# Altium PCB PCB.PcbDoc
Units mil, origin at the board's own origin, x right, y up, seen from the top; angles counter-clockwise.
Board outline 3930 x 2520 mil, 2 copper layers (Top Layer, Bottom Layer); 15 components, 44 nets, 149 pads, 25 vias.
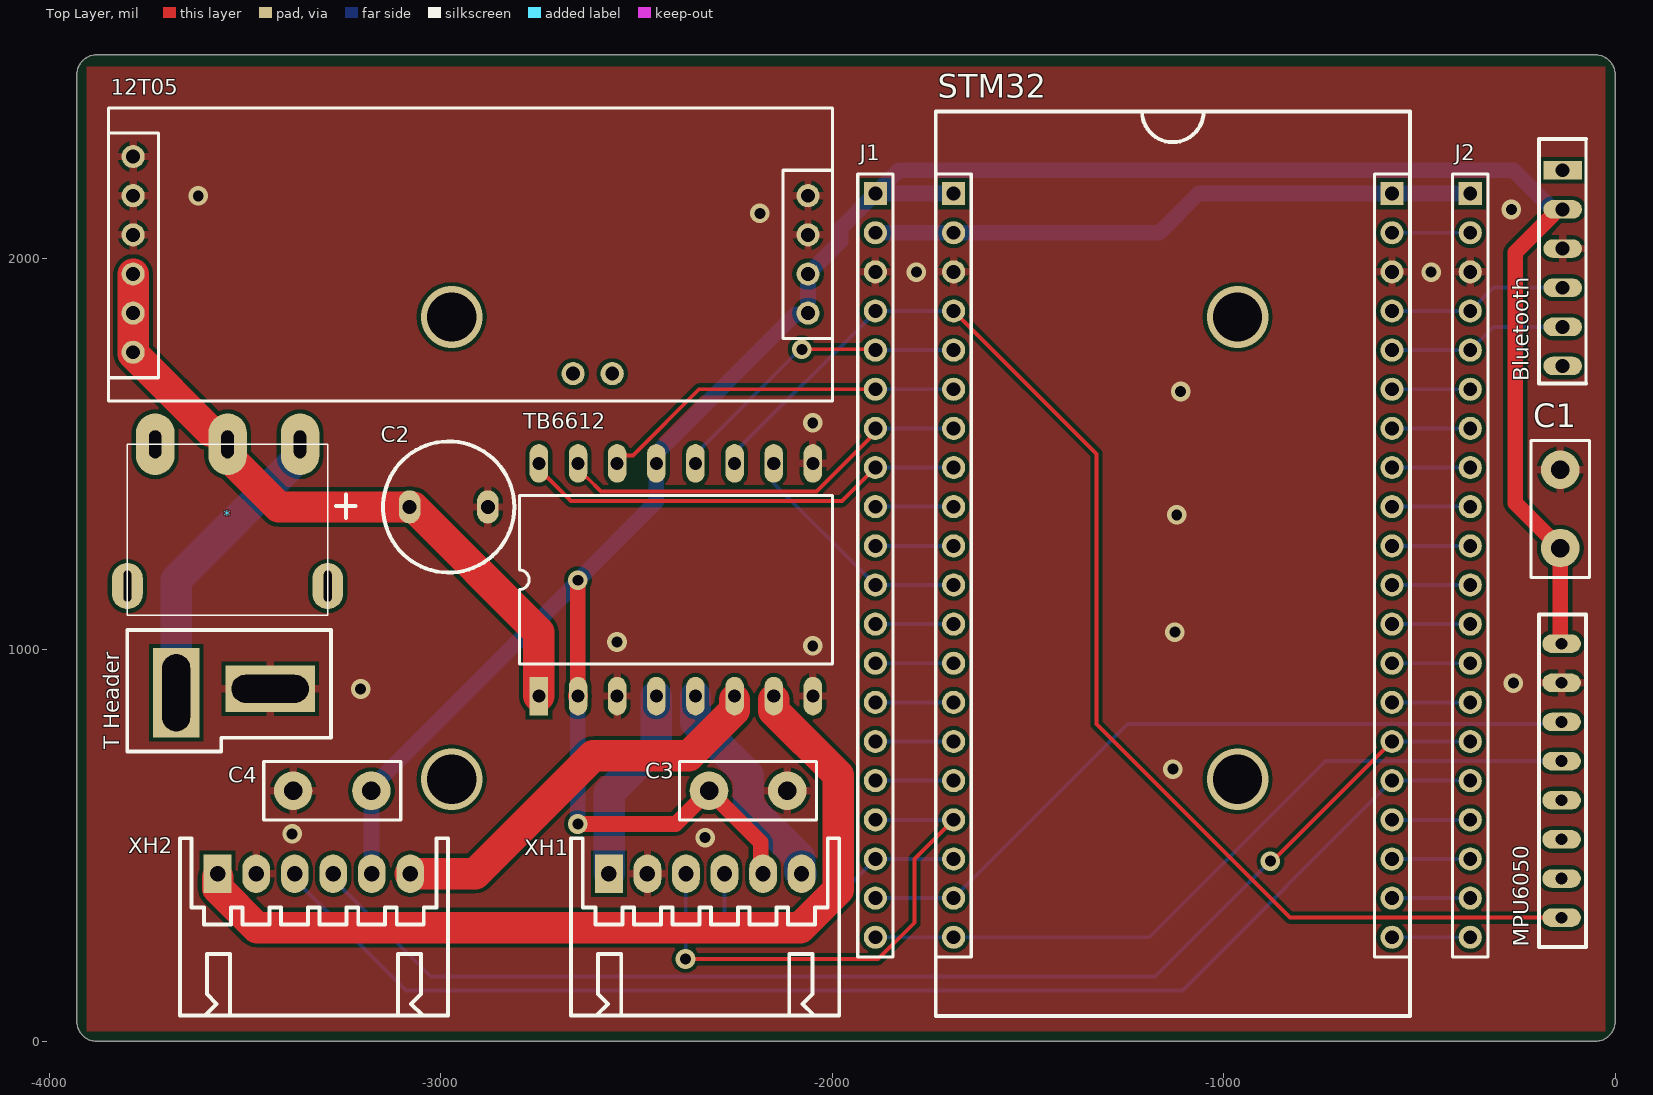
[diagram p0: Top Layer view]
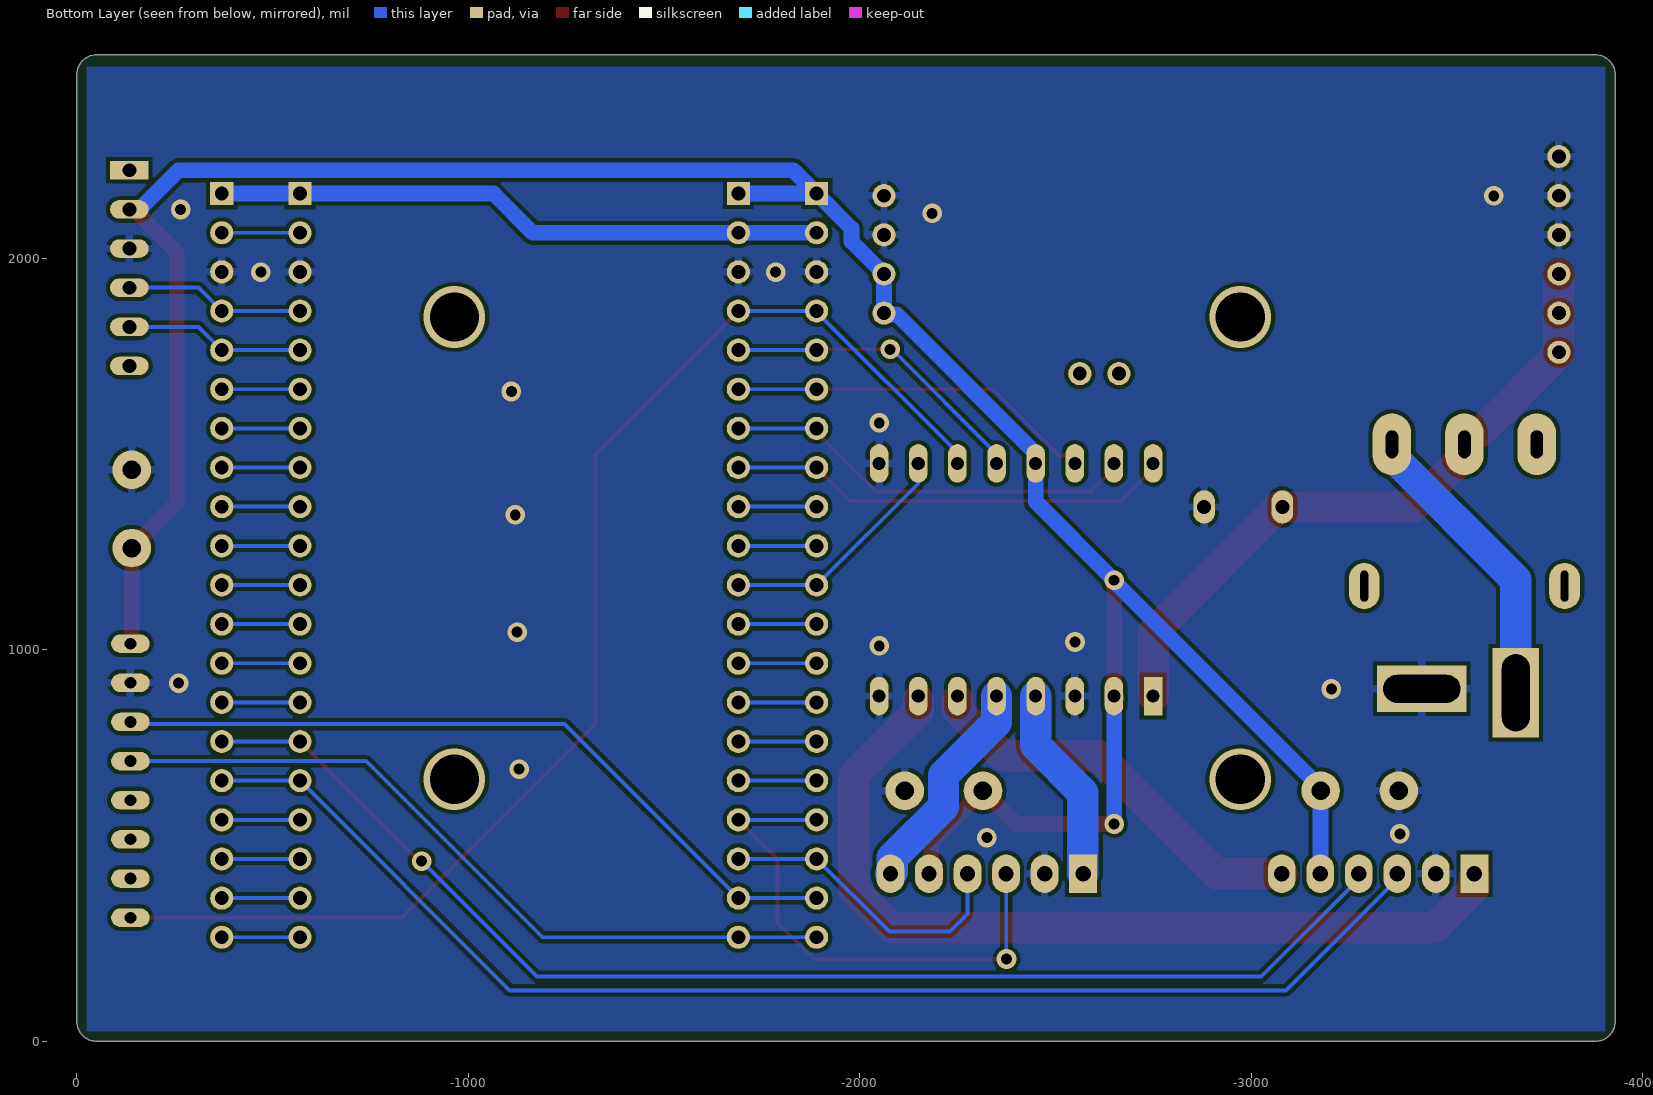
[diagram p1: Bottom Layer view, seen from below]

## Layer stack, top to bottom
Top Solder: solder mask 0.4, Solder Resist, Dk 3.5
Top Layer: signal copper 1.4
Dielectric 1: dielectric 12.6, FR-4, Dk 4.8
Bottom Layer: signal copper 1.4
Bottom Solder: solder mask 0.4, Solder Resist, Dk 3.5

## Board outline
-3930,50 ccw(c-3880,50) -3880,0 -50,0 ccw(c-50,50) 0,50 0,2470 ccw(c-50,2470) -50,2520 -3880,2520 ccw(c-3880,2470) -3930,2470

## Design rules (kind name [scope] priority, off if disabled: settings)
Clearance [All] p1: gap=10 ignorepadtopadclearanceinfootprint=FALSE except(0: Arc-Hole Track-Hole SMDPad-Hole THPad-Hole Via-Hole Fill-Hole Poly-Hole Region-Hole Text-Hole)
HoleSize [All] p1: absolutevalues=TRUE maxlimit=196.85 minlimit=1 maxpercent=80.000 minpercent=20.000
PlaneClearance [All] p1: clearance=8
PlaneConnect [All] p1: planeconnectstyle=Relief reliefexpansion=20 reliefentries=4 reliefconductorwidth=20 reliefairgap=10
PolygonConnect PolygonConnect_2 [All vs IsNamedPolygon('GND_L01_P001')] p1: thpad.connectstyle=Relief thpad.reliefconductorwidth=20 thpad.reliefentries=4 thpad.polygonreliefangle="90 Angle" thpad.airgapwidth=10 smdpad.connectstyle=Relief smdpad.reliefconductorwidth=10 smdpad.reliefentries=4 smdpad.polygonreliefangle="90 Angle" smdpad.airgapwidth=10 via.connectstyle=Direct via.reliefconductorwidth=10 via.reliefentries=4 via.polygonreliefangle="90 Angle" via.airgapwidth=10
PolygonConnect PolygonConnect_1 [All vs IsNamedPolygon('GND_L02_P000')] p2: thpad.connectstyle=Relief thpad.reliefconductorwidth=20 thpad.reliefentries=4 thpad.polygonreliefangle="90 Angle" thpad.airgapwidth=10 smdpad.connectstyle=Relief smdpad.reliefconductorwidth=10 smdpad.reliefentries=4 smdpad.polygonreliefangle="90 Angle" smdpad.airgapwidth=10 via.connectstyle=Direct via.reliefconductorwidth=10 via.reliefentries=4 via.polygonreliefangle="90 Angle" via.airgapwidth=10
PolygonConnect [All] p3: thpad.connectstyle=Relief thpad.reliefconductorwidth=10 thpad.reliefentries=4 thpad.polygonreliefangle="90 Angle" thpad.airgapwidth=10 smdpad.connectstyle=Relief smdpad.reliefconductorwidth=10 smdpad.reliefentries=4 smdpad.polygonreliefangle="90 Angle" smdpad.airgapwidth=10 via.connectstyle=Direct via.reliefconductorwidth=10 via.reliefentries=4 via.polygonreliefangle="90 Angle" via.airgapwidth=10
RoomDefinition 原理图 [InComponentClass('原理图')] p1: confinementstyle=ConfineIn formatcopy=TRUE lockcomponents=FALSE outline -3930,0 0,0 0,2519.68 -3930,2519.68
RoutingVias [All] p1: holewidth=28 width=50 viastyle="Through Hole" minholewidth=12 minwidth=22 maxholewidth=196.85 maxwidth=196.85
SilkToSolderMaskClearance [IsPad] p1: minsilkscreentomaskgap=0 clearancetoexposedcopper=TRUE
SolderMaskExpansion [All] p1: expansion=4 istentingtop=FALSE
Width 电源 [InNetClass('pwr')] p1: maxlimit=100 minlimit=40 preferedwidth=80
Width [All] p2: maxlimit=10 minlimit=10 preferedwidth=10
26 further rules are at their usual default settings.

## Classes and differential pairs
net class pwr: 3V3 5V +12 AO1 AO2 BO1 BO2 GND Net*_1

## Components (designator, comment, footprint, x,y, rotation, side; value= is the part's Value field where it differs from the comment)
12T05 "稳压12T05 T03.3" "稳压12T05 T03.3" -3786.39,2260.24 r0 top
* "KEY" SS12d11拨动电源开关 -3359.96,1525 r180 top
Bluetooth "蓝牙" 1*6弯排母 -133.94,2225.23 r270 top
C1 "0.1uF" RAD-0.2 -140,1260 r90 top
C2 "220uF" DIP-EC8X12 -3080,1365 r0 top
C3 "0.1uF" RAD-0.2 -2315,640 r0 top
C4 "0.1uF" RAD-0.2 -3177.59,640 r180 top
J1 "Female HDR1X20" Fe-HDR1X20/2.54-S -1890,2165.71 r270 top
J2 "Female HDR1X20" Fe-HDR1X20/2.54-S -370,2165.71 r270 top
MPU6050 "MPU6050" MPU6050 306.06,675.7 r270 top
STM32 "STM32" stm32 -1130,1220 r0 top
"T Header" "T型接头" "T HEAD" -3436.29,900.47 r180 top
TB6612 "TB6612" TB6612 -2749.66,881.82 r90 top
XH1 "" XH6/2.54mm/90 -2570.73,427.97 r0 top
XH2 "" XH6/2.54mm/90 -3570.5,427.97 r0 top

## Footprints (in the part's own frame and the unit in brackets; to place one, negate y for a bottom-side part, rotate by r counter-clockwise, add the part's x,y. Pads: shape width x height; smd on the part's side, far side on the other; paste and mask are expansions set on the pad)
1*6弯排母 [mm] "Connector; Header; 4 Position"
  rect 1.2x2.5 hole 0.9: 1(0,0)
  oval 1.2x2.5 hole 0.9: 2(2.54,0) 3(5.08,0) 4(7.62,0) 5(10.16,0) 6(12.7,0)
  silkscreen extent -2.03,-1.52 13.84,1.52
DIP-EC8X12 [mil]
  oval 55x85 hole 35.43: 1(0,0) 2(200,0)
  silkscreen extent -188,-168 268,168, body extent -61,-161 261,161, height 567
Fe-HDR1X20/2.54-S [mm]
  rect 1.5x1.5 hole 0.9: 1(0,0)
  round 1.5 hole 0.9: 2(2.54,0) 3(5.08,0) 4(7.62,0) 5(10.16,0) 6(12.7,0) 7(15.24,0) 8(17.78,0) 9(20.32,0) 10(22.86,0) 11(25.4,0) 12(27.94,0) 13(30.48,0) 14(33.02,0) 15(35.56,0) 16(38.1,0) 17(40.64,0) 18(43.18,0) 19(45.72,0) 20(48.26,0)
  silkscreen extent -1.27,-1.14 49.53,1.14, body extent -1.4,-1.27 49.65,1.23, height 2.74
MPU6050 [mm]
  oval 1.2x2.5 hole 0.762: 1(-8.636,-11.246) 2(-6.096,-11.246) 3(-3.556,-11.246) 4(-1.016,-11.246)
  oval 1.2x2.5 hole 0.76: 5(1.524,-11.246) 6(4.064,-11.246) 7(6.604,-11.246) 8(9.144,-11.246)
  silkscreen extent -10.54,-12.7 11.05,-9.65
RAD-0.2 [mm]
  round 2.5 hole 1.2: 1(0,0) 2(5.08,0)
  silkscreen extent -1.91,-1.91 6.98,1.91, body extent -0.96,-0.85 6.04,0.85, height 7.06
SS12d11拨动电源开关 [mm]
  oval 2x3 hole 0.5 slot 2 at 90 deg: 0(-1.8,9.2) 0(11.2,9.2)
  oval 2.5x4 hole 0.8 slot 1.8 at 90 deg: 1(0,0) 2(4.7,0) 3(9.4,0)
  silkscreen extent -1.8,0 11.2,11.1
stm32 [mm]
  rect 1.5x1.5 hole 0.9: 1(-14.224,24.021) 40(14.224,24.021)
  round 1.5 hole 0.9: 2(-14.224,21.481) 3(-14.224,18.941) 4(-14.224,16.401) 5(-14.224,13.861) 6(-14.224,11.321) 7(-14.224,8.781) 8(-14.224,6.241) 9(-14.224,3.701) 10(-14.224,1.161) 11(-14.224,-1.379) 12(-14.224,-3.919) 13(-14.224,-6.459) 14(-14.224,-8.999) 15(-14.224,-11.539) 16(-14.224,-14.079) 17(-14.224,-16.619) 18(-14.224,-19.159) 19(-14.224,-21.699) 20(-14.224,-24.239) 21(14.224,-24.239) 22(14.224,-21.699) 23(14.224,-19.159) 24(14.224,-16.619) 25(14.224,-14.079) 26(14.224,-11.539) 27(14.224,-8.999) 28(14.224,-6.459) 29(14.224,-3.919) 30(14.224,-1.379) 31(14.224,1.161) 32(14.224,3.701) 33(14.224,6.241) 34(14.224,8.781) 35(14.224,11.321) 36(14.224,13.861) 37(14.224,16.401) 38(14.224,18.941) 39(14.224,21.481)
  silkscreen extent -15.38,-29.35 15.38,29.35, body extent -15.49,-25.63 15.45,25.42, height 2.74
"T HEAD" [mm]
  rect 5.8x3 hole 1.8 slot 5 at 0 deg: 1(0,0)
  rect 3x5.8 hole 1.8 slot 5 at 90 deg: 2(6.096,0.254)
  silkscreen extent -3.94,-3.81 9.27,4.06
TB6612 [mm]
  rect 2.5x1.2 hole 0.85: 1(0,0)
  oval 2.5x1.2 hole 0.85: 2(0,-2.54) 3(0,-5.08) 4(0,-7.62) 5(0,-10.16) 6(0,-12.7) 7(0,-15.24) 8(0,-17.78) 9(15.1,-17.78) 10(15.1,-15.24) 11(15.1,-12.7) 12(15.1,-10.16) 13(15.1,-7.62) 14(15.1,-5.08) 15(15.1,-2.54) 16(15.1,0)
  silkscreen extent 2.08,-19.05 13.02,1.27
XH6/2.54mm/90 [mm]
  rect 1.8x2.5 hole 1: 1(0,0)
  oval 1.8x2.5 hole 1: 2(2.5,0) 3(5,0) 4(7.5,0) 5(10,0) 6(12.5,0)
  silkscreen extent -2.45,-9.2 14.95,2.3, body extent -2.45,-9.2 14.95,2.3, height 6.1
"稳压12T05 T03.3" [mm]
  round 1.5 hole 0.9: 1(0,0) 2(0,-2.54) 3(0,-5.08) 4(0,-7.62) 5(0,-10.16) 6(0,-12.7) 7(43.8,-10.16) 8(43.8,-7.62) 9(43.8,-5.08) 10(43.8,-2.54) 11(31.091,-14.089) 12(28.551,-14.089)
  silkscreen extent -1.6,-15.85 45.4,3.15

## Part data
C1 C3 C4: library part CAP, "无极性电容"
C2: library part DIP_ECAP, "直插电解电容"
XH1 XH2: library part XH6

## Via types
v1: diameter 50, hole 28, Top Layer to Bottom Layer, tented both sides, 17 vias
v2: diameter 50, hole 28, Top Layer to Bottom Layer, 4 vias
v3: diameter 157.48, hole 125.98, Top Layer to Bottom Layer, 4 vias

## Nets (pads, with @x,y where several pads share a name; then routed paths per layer and width w, separated by ;. In a path a pad name is that pad's centre, name@x,y a point inside that pad or via, vN(x,y) a via of type N, cw(c..) or ccw(c..) an arc to the next point about the centre after c; other vN are vias at no path point)
3V3: J1.2 J2.1 STM32.2 STM32.40 | length 1561.4
  Bottom Layer w40: J1.2 STM32.2 -1164.29,2065.71 -1064.29,2165.71 STM32.40 J2.1
5V: 12T05.7 12T05.8 Bluetooth.2 C1.1 C3.1 C4.1 J1.1 MPU6050.1 STM32.1 TB6612.2 TB6612.13 XH1.5 XH2.5 | length 6815.6
  Top Layer w40: v1(-2650,555) -2400,555 C3.1 -2182.93,507.93 -2182.93,433.87 XH1.5 ; TB6612.2@-2650,882.16 v1(-2650,1177.77) ; MPU6050.1 -140,1019.01 C1.1 -255,1375 -255,2015 -160.91,2109.09 -160.91,2121.88 -157.57,2125.23 Bluetooth.2
  Top Layer w50: TB6612.2@-2650,882.16 TB6612.2
  Bottom Layer w40: XH2.5 -3177.2,428.36 -3177.2,639.6 C4.1 -3177.59,647.47 -2650,1175.06 v1(-2650,1177.77) -2449.66,1378.11 TB6612.13 -2449.66,1501.89 -2094.95,1856.6 -2065.63,1856.6 12T05.7 12T05.8 -1978.93,2043.29 -1978.93,2076.77 J1.1 ; v1(-2650,555) -2650,871.47 -2655,876.47 TB6612.2 ; C3.1@-2326.18,628.82 C3.1 ; STM32.1 J1.1 ; Bluetooth.2 -159.53,2125.23 -259.53,2225.24 -1830.47,2225.24 J1.1
+12: 12T05.4 12T05.5 12T05.6 *.2 C2.1 TB6612.1 | length 1733.8
  Top Layer w80: 12T05.6 12T05.6@-3786.4,1756.4 ; 12T05.4 12T05.5 12T05.6@-3786.4,1756.4 ; TB6612.1 -2749.66,1044.66 -3070,1365 C2.1 -3414.53,1365 -3538.98,1489.45 -3538.98,1543.52 -3553.51,1558.05 -3588.05,1558.05 12T05.6@-3786.4,1756.4
AO1: TB6612.4 XH1.1 | length 504
  Bottom Layer w80: XH1.1 -2570,428.7 -2570,635 -2449.66,755.34 TB6612.4
AO2: TB6612.5 XH1.6 | length 566.6
  Bottom Layer w80: TB6612.5 -2349.66,814.96 -2214.21,679.52 -2214.21,598.9 -2149.12,533.81 -2148.27,533.81 -2083.17,468.71 -2083.17,432.54 XH1.6
BO1: TB6612.7 XH2.1 | length 2249.4
  Top Layer w80: XH2.1@-3570.5,418.75 -3570.5,390.5 -3470,290 -2081.97,290 -1985,386.97 -1985,680 -2149.66,844.66 TB6612.7@-2149.66,872.6
BO2: TB6612.6 XH2.6 | length 1028.7
  Top Layer w80: XH2.6 -2912.03,427.97 -2610.79,729.21 -2366.1,729.21 -2249.66,845.65 TB6612.6@-2249.66,872.6
GND: 12T05.1 12T05.2 12T05.3 12T05.9 12T05.10 "T Header.1" Bluetooth.3 C1.2 C2.2 C3.2 C4.2 J1.3 J2.3 MPU6050.2 STM32.3 STM32.38 TB6612.3 TB6612.8 TB6612.9 XH1.2 XH2.2
  other v1: -2325,520 -3380,530 -3205,900 -260,915 -2050,1010 -2550,1020 -2050,1580 -1785,1965 -470,1965 -2185,2115 -265,2125 -3620,2160
  other v2: -1130,695 -1125,1045 -1120,1345 -1110,1660
Net*_1: "T Header.2" *.1 | length 795.1
  Top Layer w80: *.1@-3359.96,1495.47 *.1
  Bottom Layer w80: -3676.29,890.47 -3676.29,1179.14 -3359.96,1495.47 *.1
PA0: J2.16 STM32.25 XH2.3 | length 3357
  Bottom Layer w10: XH2.3 -3373.65,414.19 -3089.46,130 -1105.71,130 STM32.25 J2.16
PA1: J2.15 STM32.26 XH2.4 | length 3271
  Top Layer w10: v1(-880.53,460) -875.71,460 STM32.26
  Bottom Layer w10: XH2.4 -3275.22,414.19 -3026.04,165 -1175.53,165 v1(-880.53,460) ; STM32.26 J2.15
PA2: J2.14 STM32.27 | length 200
  Bottom Layer w10: STM32.27 J2.14
PA3: J2.13 STM32.28 | length 200
  Bottom Layer w10: STM32.28 J2.13
PA4: J2.12 STM32.29 | length 200
  Bottom Layer w10: STM32.29 J2.12
PA5: J2.11 STM32.30 | length 200
  Bottom Layer w10: STM32.30 J2.11
PA6: J2.10 STM32.31 | length 200
  Bottom Layer w10: STM32.31 J2.10
PA7: J2.9 STM32.32 | length 200
  Bottom Layer w10: STM32.32 J2.9
PA8: J1.8 STM32.8 TB6612.16 | length 1144.1
  Top Layer w10: TB6612.16 -2749.66,1460.79 -2727.77,1438.9 -2726.85,1438.9 -2667.95,1380 -1975.71,1380 J1.8
  Bottom Layer w10: J1.8 STM32.8
PA9: J1.9 STM32.9 | length 200
  Bottom Layer w10: J1.9 STM32.9
PA10: J1.10 STM32.10 | length 200
  Bottom Layer w10: J1.10 STM32.10
PA11: J1.11 STM32.11 TB6612.10 | length 618.1
  Bottom Layer w10: TB6612.10 -2149.66,1425.36 J1.11 STM32.11
PA12: J1.12 STM32.12 | length 200
  Bottom Layer w10: J1.12 STM32.12
PA15: J1.13 STM32.13 | length 200
  Bottom Layer w10: J1.13 STM32.13
PB0: J2.8 STM32.33 | length 200
  Bottom Layer w10: STM32.33 J2.8
PB1: J2.7 STM32.34 | length 200
  Bottom Layer w10: STM32.34 J2.7
PB2: J2.6 STM32.35 | length 200
  Bottom Layer w10: STM32.35 J2.6
PB3: J1.14 STM32.14 | length 200
  Bottom Layer w10: J1.14 STM32.14
PB4: J1.15 STM32.15 | length 200
  Bottom Layer w10: J1.15 STM32.15
PB5: J1.16 STM32.16 | length 200
  Bottom Layer w10: J1.16 STM32.16
PB6: J1.17 STM32.17 XH1.3 | length 1346.2
  Top Layer w10: v1(-2375,210) -1882.74,210 -1790,302.74 -1790,465.71 STM32.17
  Bottom Layer w10: v1(-2375,210) -2374.44,210.56 -2374.44,427.41 XH1.3 ; J1.17 STM32.17
PB7: J1.18 STM32.18 XH1.4 | length 783.7
  Bottom Layer w10: XH1.4 -2275,427.52 -2275,325 -2230,280 -2075.71,280 J1.18 STM32.18
PB8: J1.19 MPU6050.3 STM32.19 | length 1934.1
  Bottom Layer w10: J1.19 STM32.19 -1245.47,810.24 MPU6050.3@-140,810.24
PB9: J1.20 MPU6050.4 STM32.20 | length 1939.7
  Bottom Layer w10: J1.20 STM32.20 -1189.29,265.71 -739.29,715.71 MPU6050.4
PB10: Bluetooth.5 J2.5 STM32.36 | length 460.7
  Bottom Layer w10: STM32.36 J2.5 -310.48,1825.23 Bluetooth.5
PB11: Bluetooth.4 J2.4 STM32.37 | length 460.7
  Bottom Layer w10: STM32.37 J2.4 -310.48,1925.23 Bluetooth.4
PB12: J1.4 MPU6050.8 STM32.4 TB6612.11 | length 3338.3
  Top Layer w10: STM32.4 -1325,1500.71 -1325,810 -830.71,315.71 MPU6050.8
  Bottom Layer w10: TB6612.11 -2249.66,1503.97 -1890,1863.63 J1.4 STM32.4
PB13: J1.5 STM32.5 TB6612.12 | length 795.4
  Top Layer w10: v1(-2077.85,1767.85) -1892.15,1767.85 J1.5
  Bottom Layer w10: TB6612.12 -2349.66,1500.34 -2082.15,1767.85 v1(-2077.85,1767.85) ; J1.5 STM32.5
PB14: J1.6 STM32.6 TB6612.14 | length 940.1
  Top Layer w10: TB6612.14 -2549.66,1479.69 -2532.45,1496.89 -2509.28,1496.89 -2340.46,1665.71 J1.6
  Bottom Layer w10: J1.6 STM32.6
PB15: J1.7 STM32.7 TB6612.15 | length 1070.7
  Top Layer w10: TB6612.15 -2649.66,1460.79 -2628.61,1439.75 -2626,1439.75 -2591.25,1405 -2040.75,1405 -1890,1555.75 J1.7
  Bottom Layer w10: J1.7 STM32.7
PC13: J2.19 STM32.22 | length 200
  Bottom Layer w10: STM32.22 J2.19
PC14: J2.18 STM32.23 | length 200
  Bottom Layer w10: STM32.23 J2.18
PC15: J2.17 STM32.24 | length 200
  Bottom Layer w10: STM32.24 J2.17
VBAT: J2.20 STM32.21 | length 200
  Bottom Layer w10: STM32.21 J2.20
VDDA: J2.2 STM32.39 | length 200
  Bottom Layer w10: STM32.39 J2.2
pads on no net: 12T05.11 12T05.12 *.0 *.3 Bluetooth.1 Bluetooth.6 MPU6050.5 MPU6050.6 MPU6050.7
copper on no net:
  other v3: -2972.44,669.29 -964.57,669.29 -2972.44,1850.39 -964.57,1850.39

## Polygon pours and split planes (outlines as drawn)
GND on Top Layer "GND_L01_P001" (solid, pour order 1): -3905,2490 -3905,25 -25,25 -25,2490
GND on Bottom Layer "GND_L02_P000" (solid, pour order 0): -3905,25 -25,25 -25,2490 -3905,2490

## Silkscreen, mask and mechanical layers (free items; w line width, h text height)
Mechanical 1:
  the board outline again, w10